# Altium PCB PCB_circuit.PcbDoc
Units mm, origin at the board's own origin, x right, y up, seen from the top; angles counter-clockwise.
Board outline 55 x 45 mm, 2 copper layers (Top Layer, Bottom Layer); 5 components, 21 nets, 86 pads, 12 vias.
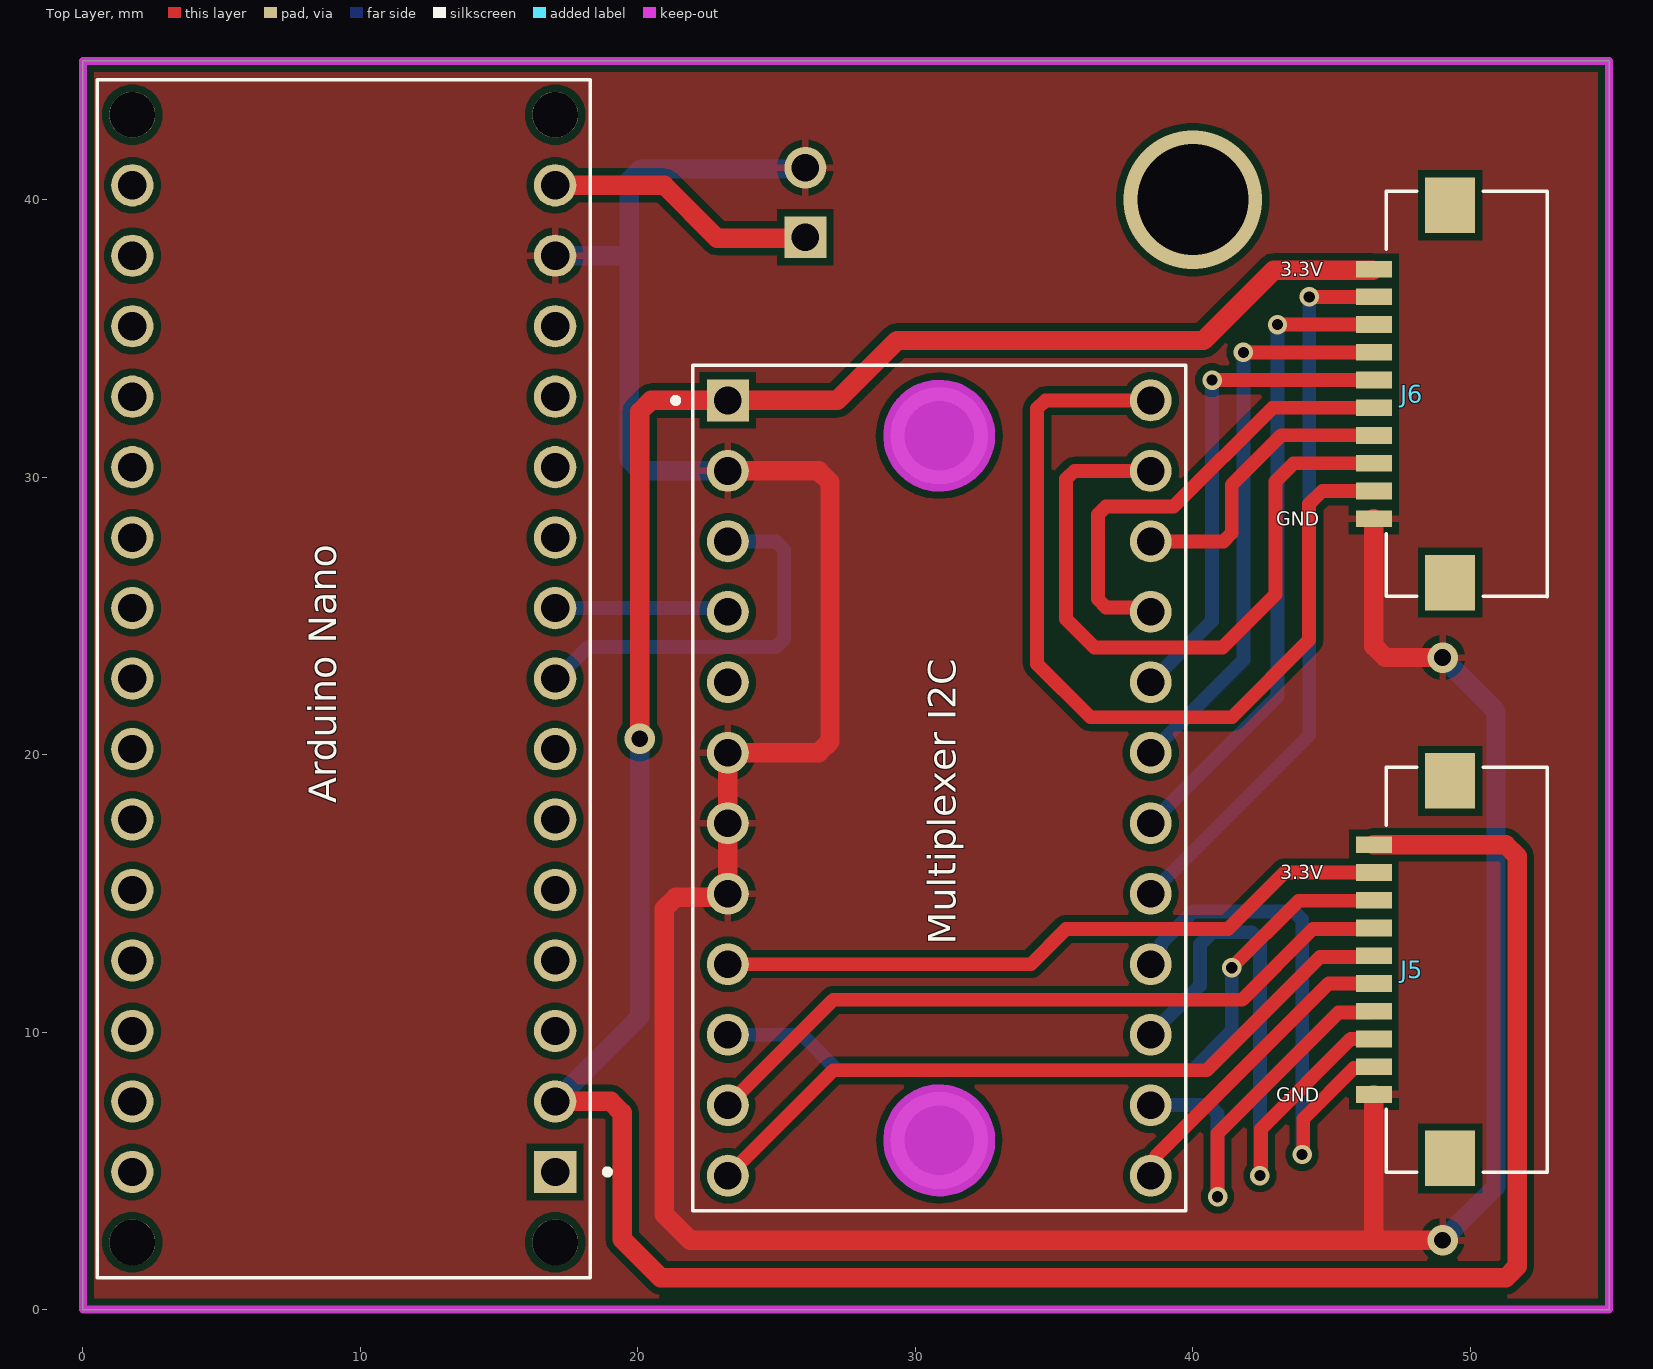
[diagram p0: Top Layer view]
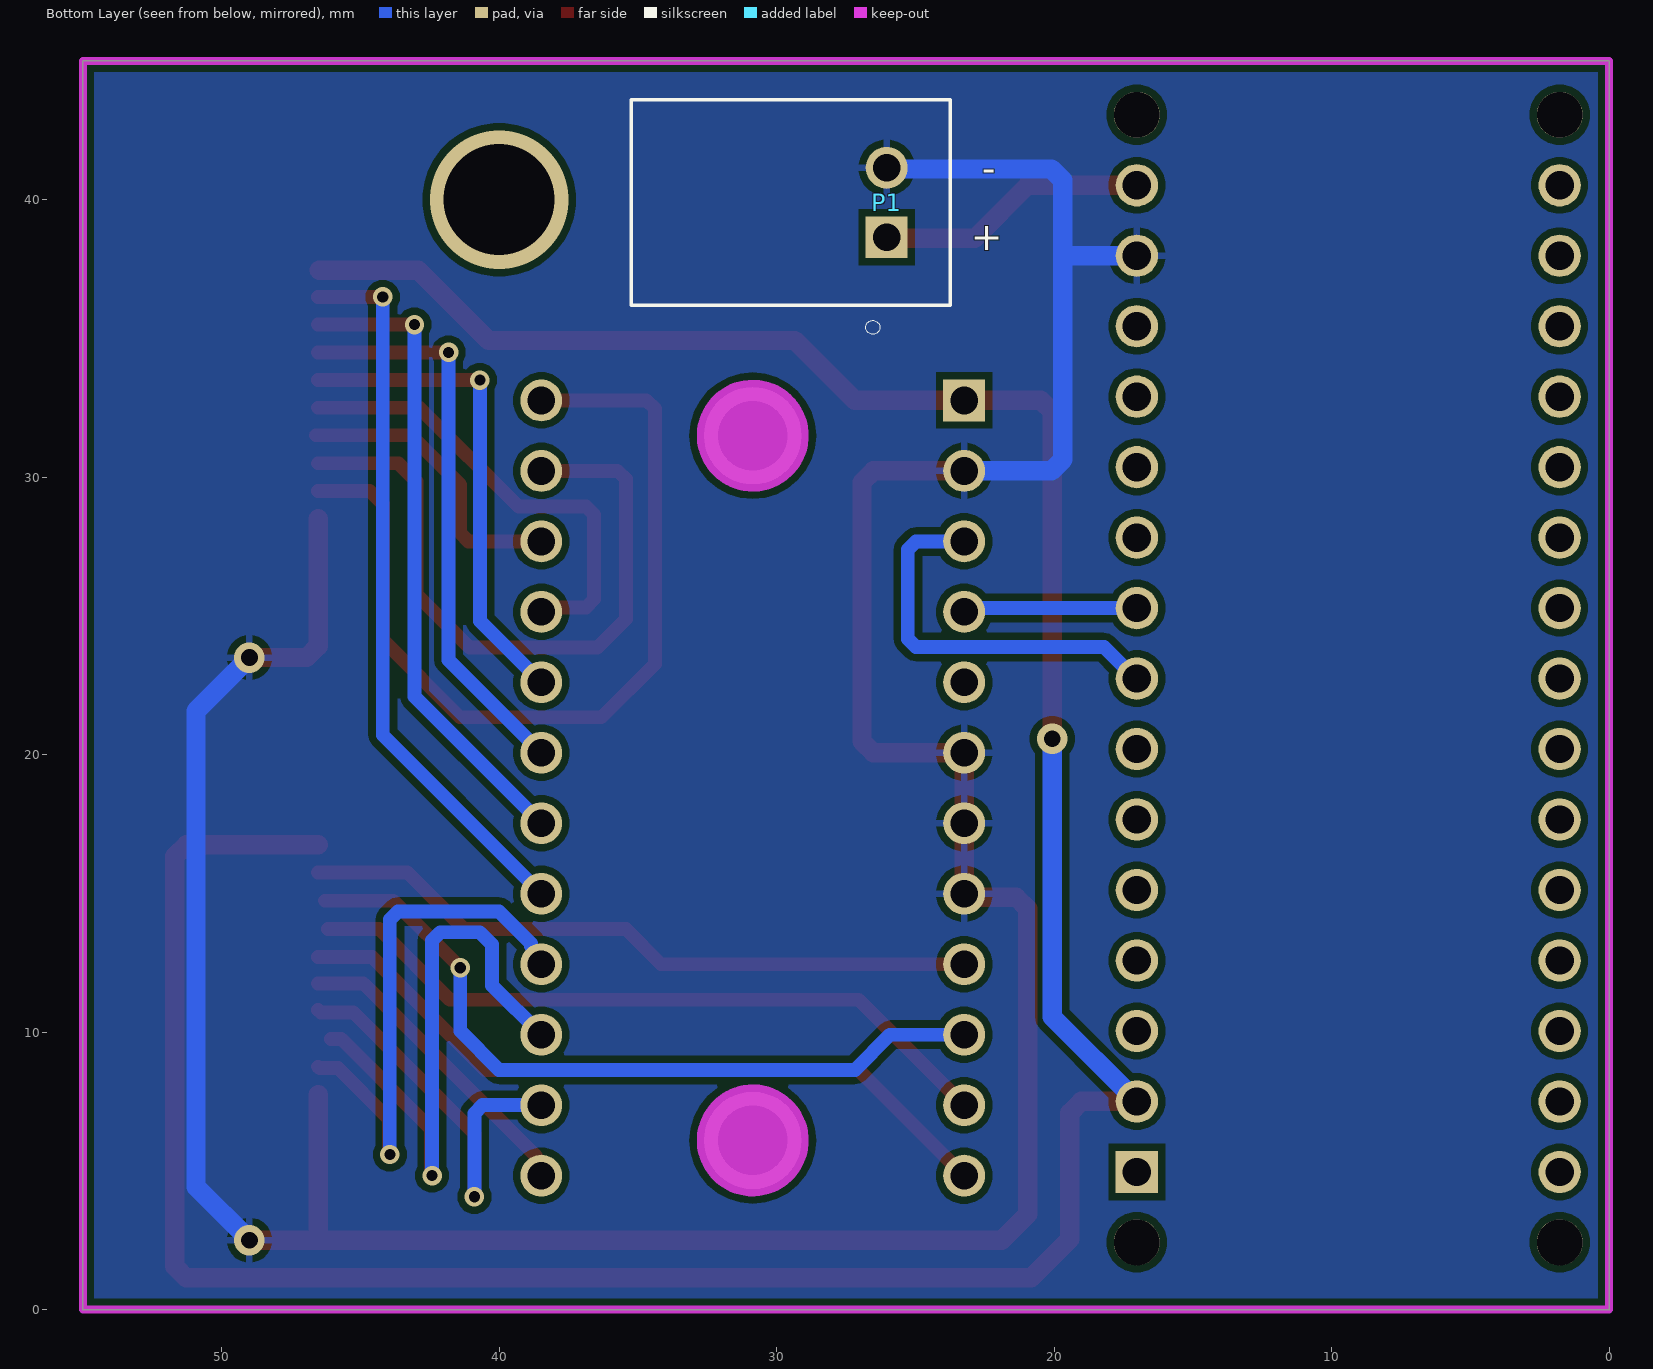
[diagram p1: Bottom Layer view, seen from below]

## Layer stack, top to bottom
Top Solder: solder mask 0.0102, Solder Resist, Dk 3.5
Top Layer: signal copper 0.0356
Dielectric 1: dielectric 0.32, FR-4, Dk 4.8
Bottom Layer: signal copper 0.0356
Bottom Solder: solder mask 0.0102, Solder Resist, Dk 3.5

## Board outline
0,0 0,45 55,45 55,0

## Design rules (kind name [scope] priority, off if disabled: settings)
Clearance [All] p1: gap=0.254 ignorepadtopadclearanceinfootprint=FALSE
PolygonConnect [All] p1: connectstyle=Relief reliefconductorwidth=0.254 reliefentries=4 polygonreliefangle="90 Angle" airgapwidth=0.254
RoutingVias [All] p1: holewidth=0.4 width=0.7 viastyle="Through Hole" minholewidth=0.4 minwidth=0.7 maxholewidth=0.6 maxwidth=1.1
SolderMaskExpansion [All] p1: expansion=0.102 istentingtop=FALSE
UnRoutedNet [All] p1: checkbadconnections=TRUE
Width [All] p1: maxlimit=0.7 minlimit=0.5 preferedwidth=0.5
29 further rules are at their usual default settings.

## Components (designator, comment, footprint, x,y, rotation, side; value= is the part's Value field where it differs from the comment)
"Arduino Nano" "ABX00028" MODULE_ABX00028 9.398,22.74 r90 top
J5 "686110148922" 686110148922 49.276,12.25 r90 top
J6 "686110148922" 686110148922 49.276,33 r90 top
"Multiplexer I2C" "2717" MODULE_2717 30.861,18.796 r0 top
P1 "S2B-XH-A(LF)(SN)" JST_S2B-XH-A(LF)(SN) 26.035,39.898 r90 bottom

## Footprints (in the part's own frame and the unit in brackets; to place one, negate y for a bottom-side part, rotate by r counter-clockwise, add the part's x,y. Pads: shape width x height; smd on the part's side, far side on the other; paste and mask are expansions set on the pad)
686110148922 [mm]
  rect 0.6x1.3 smd: 1(-4.5,2.75) 2(-3.5,2.75) 3(-2.5,2.75) 4(-1.5,2.75) 5(-0.5,2.75) 6(0.5,2.75) 7(1.5,2.75) 8(2.5,2.75) 9(3.5,2.75) 10(4.5,2.75)
  rect 2x1.8 smd: Z1(-6.8,0) Z2(6.8,0)
  silkscreen extent -7.3,-3.5 7.3,2.3
JST_S2B-XH-A(LF)(SN) [mm]
  rect 1.508x1.508 / inner round 1.508 / far side rect 1.508x1.508 hole 1: 1(-1.25,0)
  round 1.508 hole 1: 2(1.25,0)
  silkscreen extent -4.75,-2.3 3.7,9.2, body extent -3.7,-5.75 3.7,5.75, height 6.1
MODULE_2717 [mm]
  rect 1.508x1.508 / inner round 1.508 / far side rect 1.508x1.508 hole 1 mask+0.05: 1(-7.62,13.97)
  round 1.508 hole 1 mask+0.05: 2(-7.62,11.43) 3(-7.62,8.89) 4(-7.62,6.35) 5(-7.62,3.81) 6(-7.62,1.27) 7(-7.62,-1.27) 8(-7.62,-3.81) 9(-7.62,-6.35) 10(-7.62,-8.89) 11(-7.62,-11.43) 12(-7.62,-13.97) 13(7.62,-13.97) 14(7.62,-11.43) 15(7.62,-8.89) 16(7.62,-6.35) 17(7.62,-3.81) 18(7.62,-1.27) 19(7.62,1.27) 20(7.62,3.81) 21(7.62,6.35) 22(7.62,8.89) 23(7.62,11.43) 24(7.62,13.97)
  round 3.516 hole 2.5 mask+0.05: P1(0,12.7) P2(0,-12.7)
  Keep-Out Layer circle w2.032: c0,12.7 r1
  Keep-Out Layer circle w2.032: c0,12.7 r1
  Keep-Out Layer circle w2.032: c0,-12.7 r1
  Keep-Out Layer circle w2.032: c0,-12.7 r1
  silkscreen extent -9.6,-15.24 8.89,15.24
MODULE_ABX00028 [mil]
  rect 60x60 / inner round 60 / far side rect 60x60 hole 40: 1(-700,-300)
  round 60 hole 40: 2(-600,-300) 3(-500,-300) 4(-400,-300) 5(-300,-300) 6(-200,-300) 7(-100,-300) 8(0,-300) 9(100,-300) 10(200,-300) 11(300,-300) 12(400,-300) 13(500,-300) 14(600,-300) 15(700,-300) 16(700,300) 17(600,300) 18(500,300) 19(400,300) 20(300,300) 21(200,300) 22(100,300) 23(0,300) 24(-100,300) 25(-200,300) 26(-300,300) 27(-400,300) 28(-500,300) 29(-600,300) 30(-700,300)
  round 65 hole 65 unplated: ""(-800,-300) ""(-800,300) ""(800,-300) ""(800,300)
  silkscreen extent -850,-378 850,350, body extent -895,-350 850,350, height 236

## Part data
"Arduino Nano": "Arduinoâ€™s 5V compatible board in the smallest available form factor: 45x18mm!", Package=None, Availability="Not in stock", Check_prices=https://www.snapeda.com/parts/Arduino%20Nano%20Every/Arduino/view-part/?ref=eda, MF=Arduino, MP="Arduino Nano Every", Price=None, SnapEDA_Link=https://www.snapeda.com/parts/Arduino%20Nano%20Every/Arduino/view-part/?ref=snap
J5 J6: "10 Position FFC, FPC Connector Contacts, Bottom 0.039 (1.00mm) Surface Mount, Right Angle", Package=None, Availability="In Stock", Check_prices=https://www.snapeda.com/parts/686110148922/Wurth+Elektronik/view-part/?ref=eda, MF="Wurth Elektronik", MP=686110148922, Price=None, Purchase-URL=https://pricing.snapeda.com/search/part/686110148922/?ref=eda, SnapEDA_Link=https://www.snapeda.com/parts/686110148922/Wurth+Elektronik/view-part/?ref=snap
"Multiplexer I2C": "Module: multiplexer; I2C interface multiplexer; TCA9548A; 3Ã·5VDC", Package=None, Availability="In Stock", Check_prices=https://www.snapeda.com/parts/2717/Adafruit+Industries+LLC/view-part/?ref=eda, MF=Adafruit, MP=2717, Price=None, Purchase-URL=https://pricing.snapeda.com/search/part/2717/?ref=eda, SnapEDA_Link=https://www.snapeda.com/parts/2717/Adafruit+Industries+LLC/view-part/?ref=snap
P1: "Connector Header Through Hole, Right Angle 2 position 0.098 (2.50mm)", Package=None, Check_prices=https://www.snapeda.com/parts/S2B-XH-A(LF)(SN)/JST+Sales+America+Inc./view-part/?ref=eda, Digi-Key_Part_Number=455-2257-ND, MF="JST Sales", MP=S2B-XH-A(LF)(SN), Purchase-URL=https://pricing.snapeda.com/search/part/S2B-XH-A(LF)(SN)/?ref=eda, SnapEDA_Link=https://www.snapeda.com/parts/S2B-XH-A(LF)(SN)/JST+Sales+America+Inc./view-part/?ref=snap

## Via types
v1: diameter 0.7, hole 0.4, Top Layer to Bottom Layer, 8 vias
v2: diameter 1.1, hole 0.6, Top Layer to Bottom Layer, 3 vias
v3: diameter 5, hole 4, Top Layer to Bottom Layer, 1 vias

## Nets (pads, with @x,y where several pads share a name; then routed paths per layer and width w, separated by ;. In a path a pad name is that pad's centre, name@x,y a point inside that pad or via, vN(x,y) a via of type N, cw(c..) or ccw(c..) an arc to the next point about the centre after c; other vN are vias at no path point)
+3.3: "Arduino Nano.2" "Multiplexer I2C.1" J5.10 J6.10 | length 114.9
  Top Layer w0.7: 17.018,7.5 19.021,7.5 19.431,7.09 19.431,2.54 20.828,1.143 51.279,1.143 51.689,1.553 51.689,16.34 51.279,16.75 J5.10 ; v2(20.066,20.574) 20.066,32.356 20.476,32.766 23.201,32.766 ; 23.241,32.766 27.178,32.766 29.337,34.925 40.386,34.925 42.923,37.462 J6.10@46.482,37.462
  Bottom Layer w0.7: 17.018,7.5 20.066,10.548 v2(20.066,20.574)
GND: "Arduino Nano.14" "Multiplexer I2C.2" "Multiplexer I2C.6" "Multiplexer I2C.7" "Multiplexer I2C.8" J5.1 J6.1 P1.2 | length 122.7
  Top Layer w0.7: 17.018,37.98 17.241,37.98 ; 22.868,20.066 23.05,19.883 23.05,19.875 23.241,19.685 23.241,17.526 23.241,14.986 23.114,14.859 21.365,14.859 20.955,14.449 20.955,3.429 21.884,2.5 46.33,2.5 ; 23.109,30.226 23.241,30.226 26.514,30.226 26.924,29.816 26.924,20.476 26.514,20.066 23.241,20.066 ; J5.1 46.526,2.696 46.33,2.5 ; J6.1 46.526,23.91 46.936,23.5 v2(49,23.5) ; v2(49,2.5) 46.33,2.5
  Bottom Layer w0.7: 17.018,37.98 19.678,37.98 19.685,37.973 ; 23.185,30.226 20.095,30.226 19.685,30.636 19.685,37.973 ; P1.2@26.035,41.108 20.095,41.108 19.685,40.698 19.685,37.973 ; v2(49,2.5) 50.927,4.427 50.927,21.573 v2(49,23.5)
"NetArduino Nano_8": "Arduino Nano.8" "Multiplexer I2C.3" | length 14.3
  Bottom Layer w0.5: 17.018,22.74 17.068,22.74 18.204,23.876 24.98,23.876 25.273,24.169 25.273,27.393 24.98,27.686 23.158,27.686
"NetArduino Nano_9": "Arduino Nano.9" "Multiplexer I2C.4" | length 6.3
  Bottom Layer w0.5: 17.018,25.28 23.107,25.28 23.241,25.146
"NetArduino Nano_15": "Arduino Nano.15" P1.1 | length 9.8
  Top Layer w0.7: 17.018,40.52 20.948,40.52 22.86,38.608 P1.1@26.035,38.608
NetJ5_2: "Multiplexer I2C.16" J5.2 | length 19.7
  Top Layer w0.5: v1(43.942,5.588) 43.98,5.626 43.98,6.867 45.813,8.7 46.476,8.7 J5.2
  Bottom Layer w0.5: 38.481,12.446 38.481,12.719 38.854,13.092 38.854,13.2 40.005,14.351 43.649,14.351 43.942,14.058 v1(43.942,5.588)
NetJ5_3: "Multiplexer I2C.15" J5.3 | length 21.6
  Top Layer w0.5: v1(42.418,4.826) 42.456,4.864 42.456,6.515 45.691,9.75 J5.3@46.072,9.75
  Bottom Layer w0.5: 38.481,9.906 40.259,11.684 40.259,13.158 40.698,13.597 42.125,13.597 42.418,13.304 v1(42.418,4.826)
NetJ5_4: "Multiplexer I2C.14" J5.4 | length 15.7
  Top Layer w0.5: v1(40.894,4.064) 40.894,6.35 45.244,10.7 46.431,10.7 J5.4@46.526,10.795
  Bottom Layer w0.5: 38.044,7.366 40.601,7.366 40.894,7.073 v1(40.894,4.064)
NetJ5_5: "Multiplexer I2C.13" J5.5 | length 11.2
  Top Layer w0.5: 38.481,4.826 38.674,5.019 38.674,5.527 44.897,11.75 J5.5
NetJ5_6: "Multiplexer I2C.12" J5.6 | length 26.6
  Top Layer w0.5: 23.241,4.826 27.039,8.624 40.501,8.624 44.577,12.7 45.88,12.7 J5.6@46.53,12.7
NetJ5_7: "Multiplexer I2C.11" J5.7 | length 25.6
  Top Layer w0.5: 23.241,7.366 27.039,11.164 41.771,11.164 44.323,13.716 J5.7@46.163,13.716
NetJ5_8: "Multiplexer I2C.10" J5.8 | length 27.4
  Top Layer w0.5: v1(41.402,12.319) 43.815,14.732 J5.8@46.273,14.732
  Bottom Layer w0.5: 23.241,9.906 25.908,9.906 27.178,8.636 40.005,8.636 41.402,10.033 v1(41.402,12.319)
NetJ5_9: "Multiplexer I2C.9" J5.9 | length 24.3
  Top Layer w0.5: 23.625,12.446 34.162,12.446 35.432,13.716 41.275,13.716 43.309,15.75 J5.9
NetJ6_2: "Multiplexer I2C.24" J6.2 | length 32.6
  Top Layer w0.5: 38.481,32.766 34.683,32.766 34.39,32.473 34.39,23.268 36.31,21.348 41.414,21.348 44.194,24.128 44.194,29.029 44.665,29.5 J6.2
NetJ6_3: "Multiplexer I2C.23" J6.3 | length 24.9
  Top Layer w0.5: 38.481,30.226 35.726,30.226 35.433,29.933 35.433,24.892 36.461,23.864 41.076,23.864 42.976,25.764 42.976,29.845 43.631,30.5 J6.3
NetJ6_4: "Multiplexer I2C.22" J6.4 | length 10.7
  Top Layer w0.5: 38.481,27.686 41.109,27.686 41.402,27.979 41.402,29.718 43.196,31.512 J6.4@46.609,31.512
NetJ6_5: "Multiplexer I2C.21" J6.5 | length 16.7
  Top Layer w0.5: 38.481,25.146 38.319,25.308 36.869,25.308 36.576,25.601 36.576,28.651 36.869,28.944 39.308,28.944 42.864,32.5 J6.5
NetJ6_6: "Multiplexer I2C.20" J6.6 | length 17.7
  Top Layer w0.5: v1(40.694,33.5) J6.6
  Bottom Layer w0.5: 38.544,22.543 38.544,22.669 40.694,24.819 v1(40.694,33.5)
NetJ6_7: "Multiplexer I2C.19" J6.7 | length 20.5
  Top Layer w0.5: v1(41.821,34.5) J6.7
  Bottom Layer w0.5: 38.481,20.066 41.821,23.406 v1@41.821,34.506
NetJ6_8: "Multiplexer I2C.18" J6.8 | length 23.4
  Top Layer w0.5: v1@43.053,35.433 43.107,35.433 43.174,35.5 J6.8
  Bottom Layer w0.5: 38.481,17.526 43.053,22.098 v1(43.053,35.5)
NetJ6_9: "Multiplexer I2C.17" J6.9 | length 26.2
  Top Layer w0.5: v1@44.196,36.449 44.25,36.449 44.301,36.5 J6.9
  Bottom Layer w0.5: 38.481,14.986 44.196,20.701 v1(44.196,36.5)
pads on no net: "Arduino Nano.1" "Arduino Nano.3" "Arduino Nano.4" "Arduino Nano.5" "Arduino Nano.6" "Arduino Nano.7" "Arduino Nano.10" "Arduino Nano.11" "Arduino Nano.12" "Arduino Nano.13" "Arduino Nano.16" "Arduino Nano.17" "Arduino Nano.18" "Arduino Nano.19" "Arduino Nano.20" "Arduino Nano.21" "Arduino Nano.22" "Arduino Nano.23" "Arduino Nano.24" "Arduino Nano.25" "Arduino Nano.26" "Arduino Nano.27" "Arduino Nano.28" "Arduino Nano.29" "Arduino Nano.30" "Arduino Nano." "Multiplexer I2C.5" "Multiplexer I2C.P1" "Multiplexer I2C.P2" J5.Z1 J5.Z2 J6.Z1 J6.Z2
copper on no net:
  other v3: 40,40

## Polygon pours and split planes (outlines as drawn)
GND on Top Layer "GND_L01_P000" (solid, remove dead copper, pour order 0): 0,0 55,0 55,45 0,45
GND on Bottom Layer "GND_L02_P001" (solid, remove dead copper, pour order 1): 0,0 55,0 55,45 0,45

## Keep-outs
Keep-Out Layer:
  the board outline again, w0.3

## Silkscreen, mask and mechanical layers (free items; w line width, h text height)
Top Overlay:
  text "3.3V" at 43.15,37.25 h0.5
  text "3.3V" at 43.15,15.517 h0.5
Bottom Overlay:
  text "-" at 22.098,40.648 h1
  text "+" at 21.844,38.187 h1

## Text inside footprints (layer, text, board x,y; h text height)
J5: Top Overlay "GND" at 43,7.493 h0.5; Mechanical 13 "1" at 48.076,7.5 h0.61 r90
J6: Top Overlay "GND" at 43,28.25 h0.5; Mechanical 13 "1" at 48.076,28.25 h0.61 r90